# EAGLE board Chassis2 (EAGLE 9.6.2)
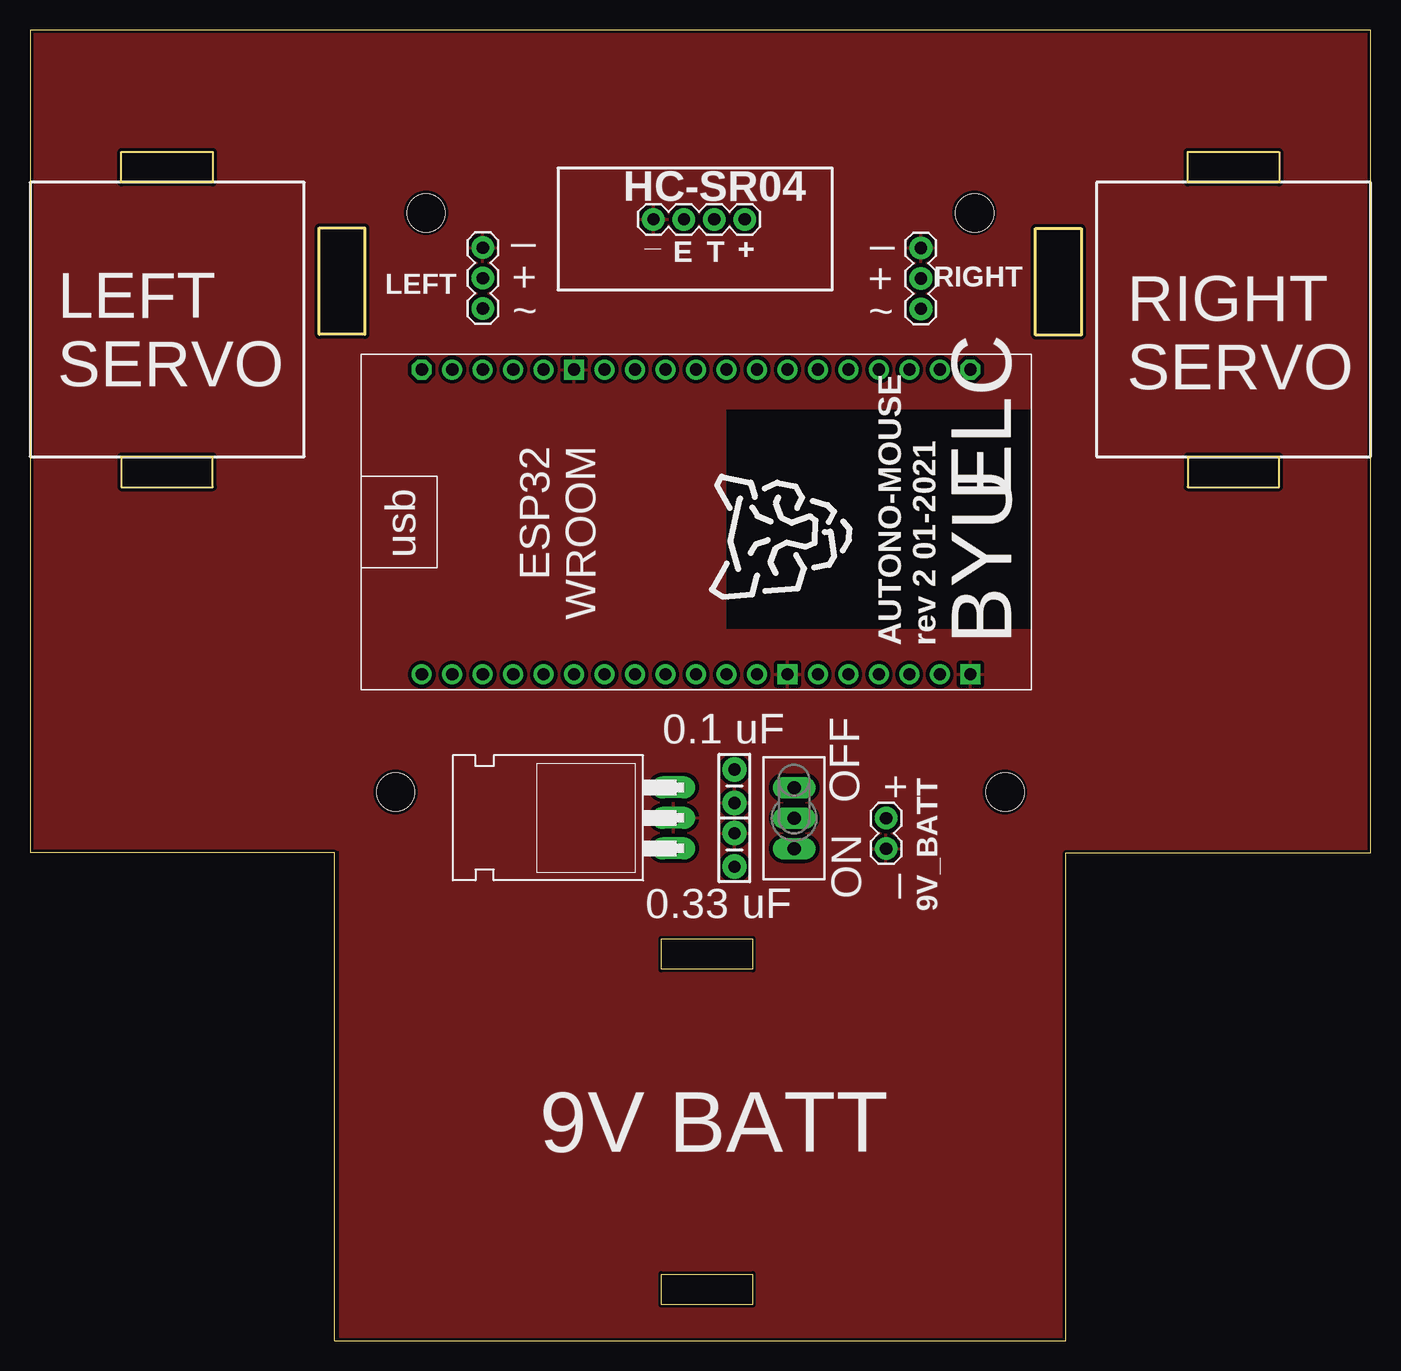
[diagram p0: board, top side]
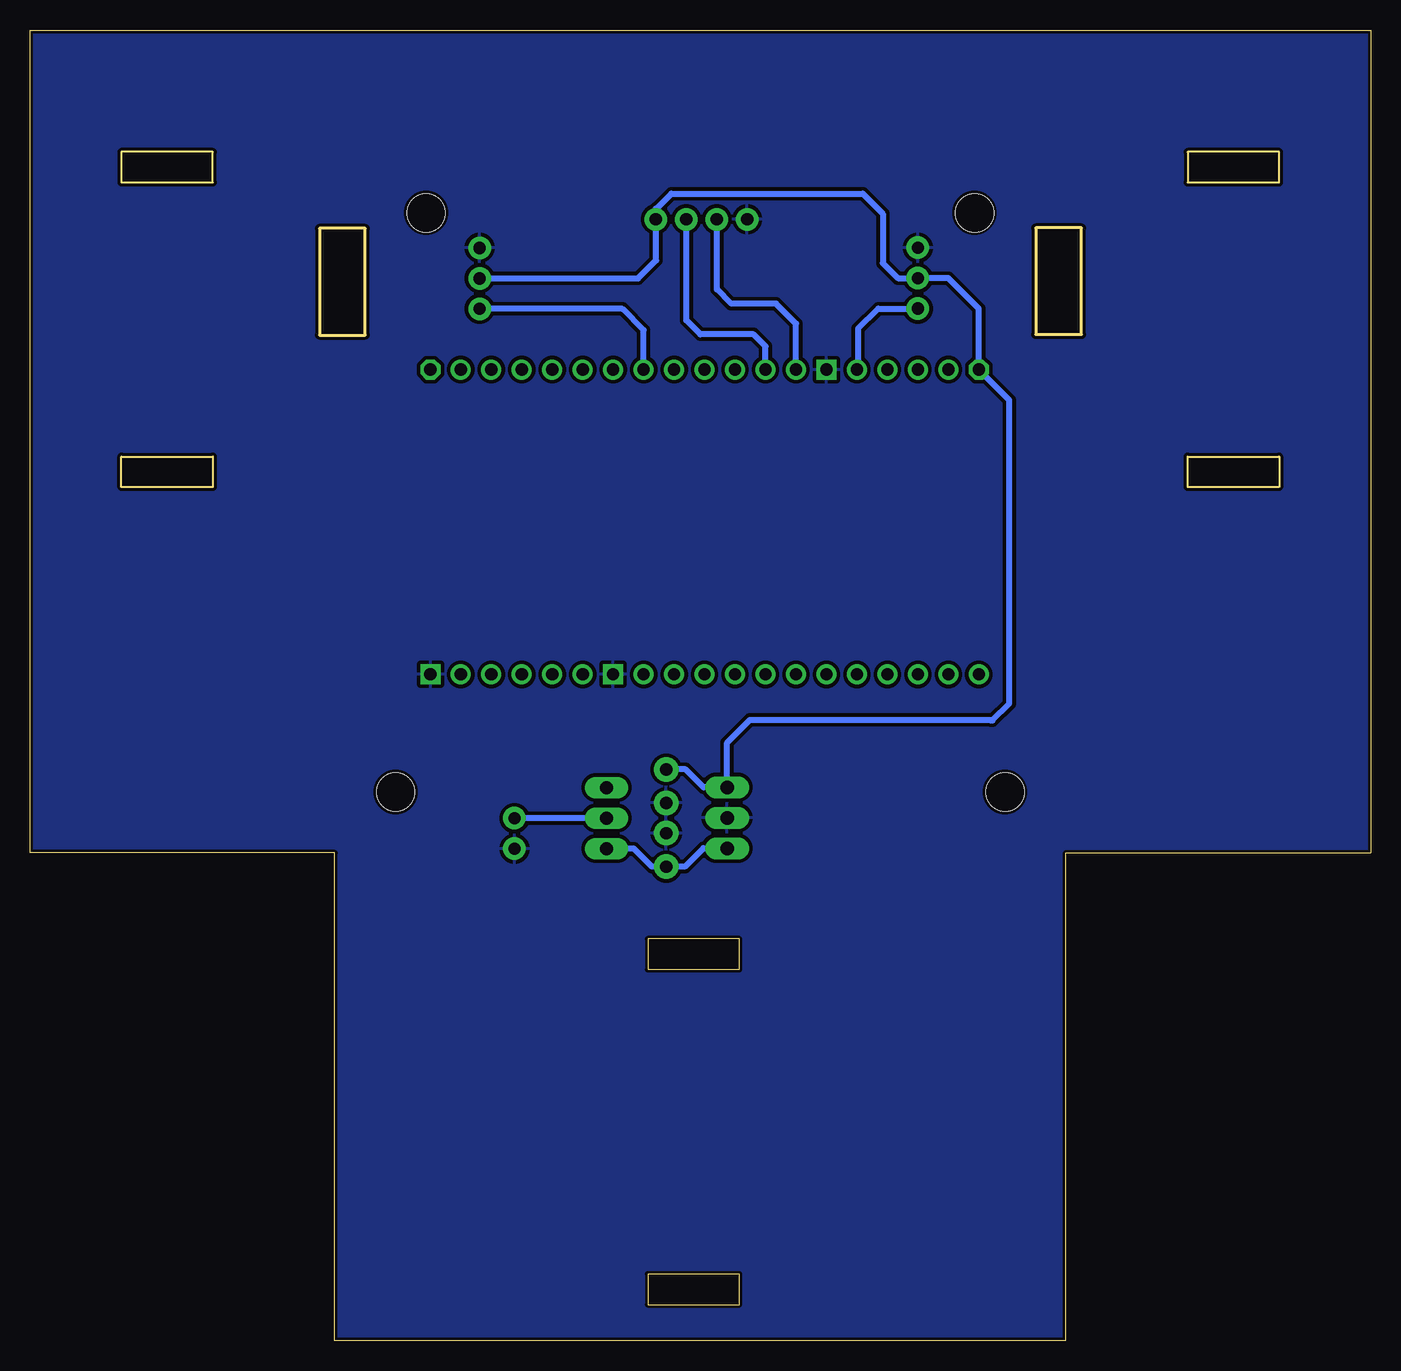
[diagram p1: board, bottom side, seen from below]

Size 111.76 x 109.22 mm. Coordinates in mm from the lower left corner, seen from the top.
Outline: 25.4,0 86.36,0 86.36,40.64 111.76,40.64 111.76,109.22 0,109.22 0,40.64 25.4,40.64 25.4,0
Outline: 7.62,96.52 7.62,99.06 15.24,99.06 15.24,96.52 7.62,96.52
Outline: 7.62,73.66 7.62,71.12 15.24,71.12 15.24,73.66 7.62,73.66
Outline: 96.52,96.52 96.52,99.06 104.14,99.06 104.14,96.52 96.52,96.52
Outline: 96.52,73.66 96.52,71.12 104.14,71.12 104.14,73.66 96.52,73.66
Outline: 27.91,83.84 24.11,83.84 24.11,92.73 27.91,92.73 27.91,83.84
Outline: 87.63,83.8 83.82,83.8 83.82,92.69 87.63,92.69 87.63,83.8
Outline: 52.63,30.94 52.63,33.48 60.25,33.48 60.25,30.94 52.63,30.94
Outline: 52.63,3 52.63,5.54 60.25,5.54 60.25,3 52.63,3
Copper layers (1*16): Top 0.035mm / dielectric 1.5mm / Bottom 0.035mm
Design rules "ECENshop": minimum track width 10mil, minimum drill 0.3mm, track to track 12mil, track to pad 12mil, pad to pad 12mil, via to via 12mil, smd to smd 12mil, copper to edge 10mil, drill to drill 0.3mm, minimum pad ring 12mil, minimum via ring 12mil, stop-mask expansion 3mil, vias tented up to drill 25mil, thermal gap 12mil
Holes 3.17 mm at 33.02,93.98 30.48,45.72 81.28,45.72 78.74,93.98

## Footprints (pad centres in the part's own frame; a part is rotated, then mirrored left to right if it is on the bottom)
1X02 = drill 1.016 pad 1.88: 1 0,0; 2 2.54,0
CAP-PTH-SMALL-KIT = drill 1.016 pad 2.032: 1 -1.397,0; 2 1.397,0
1X04 = drill 1.016 pad 1.88: 1 0,0; 2 2.54,0; 3 5.08,0; 4 7.62,0
1X03 = drill 1.016 pad 1.88: 1 0,0; 2 2.54,0; 3 5.08,0
TL3XPO = drill 1.1 pad 1.422 long: 1 -2.54,0; 2 0,0; 3 2.54,0
TO220H = drill 1.118 long: 1 -2.54,-10.16; 2 0,-10.16; 3 2.54,-10.16
ESP32-WROOM-32 = drill 1.016 octagon: P$1 1.27,5.08; P$19 1.27,50.8 | drill 1.016: P$2 1.27,7.62; P$3 1.27,10.16; P$4 1.27,12.7; P$5 1.27,15.24; P$7 1.27,20.32; P$8 1.27,22.86; P$9 1.27,25.4; P$10 1.27,27.94; P$11 1.27,30.48; P$12 1.27,33.02; P$13 1.27,35.56; P$14 1.27,38.1; P$15 1.27,40.64; P$16 1.27,43.18; P$17 1.27,45.72; P$18 1.27,48.26; P$20 26.67,5.08; P$21 26.67,7.62; P$22 26.67,10.16; P$23 26.67,12.7; P$24 26.67,15.24; P$25 26.67,17.78; P$26 26.67,20.32; P$27 26.67,22.86; P$28 26.67,25.4; P$29 26.67,27.94; P$30 26.67,30.48; P$31 26.67,33.02; P$33 26.67,38.1; P$34 26.67,40.64; P$35 26.67,43.18; P$36 26.67,45.72; P$37 26.67,48.26 | drill 1.016 square: P$6 1.27,17.78; P$32 26.67,35.56; P$38 26.67,50.8

## Placement (x,y rotation side)
9V_BATT  [1X02]  71.37,41 90 top
C1  0.33uF  [CAP-PTH-SMALL-KIT]  58.72,40.89 90 top
C2  0.1uF  [CAP-PTH-SMALL-KIT]  58.72,46.2 270 top
HC-SR04  [1X04]  51.97,93.45 0 top
LEFT  SERVO  [1X03]  37.74,86 90 top
RIGHT  SERVO  [1X03]  74.27,85.98 90 top
S1  TL36PO  [TL3XPO]  63.7,43.54 270 top
U2  LM7805  [TO220H]  43.48,43.56 90 top
U$1  FRAME-BADGE  [DUMMY]  33.86,49.89 90 top
U$2  SHOP_ESP  [ESP32-WROOM-32]  27.58,82.19 270 top

## Library data of the parts
9V_BATT = SparkFun-Connectors
C1 C2 = SparkFun-Capacitors; PROD_ID: CAP-08370
HC-SR04 = SparkFun-Connectors; PROD_ID: CONN-09696
LEFT RIGHT = SparkFun-Electromechanical
S1 = switch
U2 = class-parts
U$1 = AndysLib
U$2 = AAALib

## Nets
3V3: U$2.P$19
5V: C2.1 HC-SR04.4 LEFT.2 RIGHT.2 U2.3 U$2.P$1
CMD: U$2.P$2
ECHO: HC-SR04.2 U$2.P$7
GND: 9V_BATT.1 C1.2 C2.2 HC-SR04.1 LEFT.3 RIGHT.3 U2.2 U$2.P$6 U$2.P$32 U$2.P$38
LEFT_SERVO: LEFT.1 U$2.P$5
N$1: 9V_BATT.2 S1.2
RIGHT_SERVO: RIGHT.1 U$2.P$12
TRIGGER: HC-SR04.3 U$2.P$8
VIN: C1.1 S1.3 U2.1

## Tracks (layer width: path | path; a pad name or v marks a point on that pad's centre or on a via)
5V
  Bottom 0.508: C2.1 57.1,47.6 55.6,46.1 U2.3 53.65,49.84 51.74,51.74 31.73,51.74 31.67,51.69 31.52,51.69 30.12,53.09 30.12,78.38 U$2.P$1 32.66,86 35.2,88.54 LEFT.2 39.42,88.54 40.66,89.79 40.66,93.9 42.34,95.58 58.29,95.58 59.59,94.29 | 59.59,94.34 59.59,94.29 | 59.59,94.29 59.59,93.9 | 59.59,93.9 HC-SR04.4 | RIGHT.2 61.06,88.52 59.56,90.02 59.56,93.88 59.59,93.9
ECHO
  Bottom 0.508: U$2.P$7 47.9,84.76 49.55,86.41 53.31,86.41 54.51,87.61 HC-SR04.2
GND
  pour Bottom: 0,109.22 0,40.64 25.7,40.64 25.7,0.05 86.66,0.05 86.66,40.64 111.81,40.64 111.81,109.22
  pour Top: 0.33,109.19 111.86,109.19 111.86,40.61 86.61,40.61 86.61,0.28 25.86,0.28 25.86,40.87 0.33,40.87
LEFT_SERVO
  Bottom 0.508: U$2.P$5 42.72,81.03 42.72,84.33 41.05,86 LEFT.1
N$1
  Bottom 0.508: S1.2 9V_BATT.2
RIGHT_SERVO
  Bottom 0.508: U$2.P$12 60.6,84.2 62.38,85.98 RIGHT.1
TRIGGER
  Bottom 0.508: U$2.P$8 50.44,82.86 51.44,83.84 55.88,83.84 57.05,85.01 HC-SR04.3
VIN
  Bottom 0.508: U2.1 53.67,41.05 55.63,41.05 57.17,39.5 C1.1 59.92,39.5 61.42,41 S1.3

## Text on the board
tPlace: _ | _ | _ | E | T | + | + | + | ~ | ~ | LEFT / SERVO | RIGHT / SERVO
tNames: ELC | AUTONO-MOUSE / rev 2 01-2021 | BYU | 0.1 uF | + | OFF | _ | ON | 0.33 uF | 9V BATT